# EAGLE board Eagle (EAGLE 5.11)
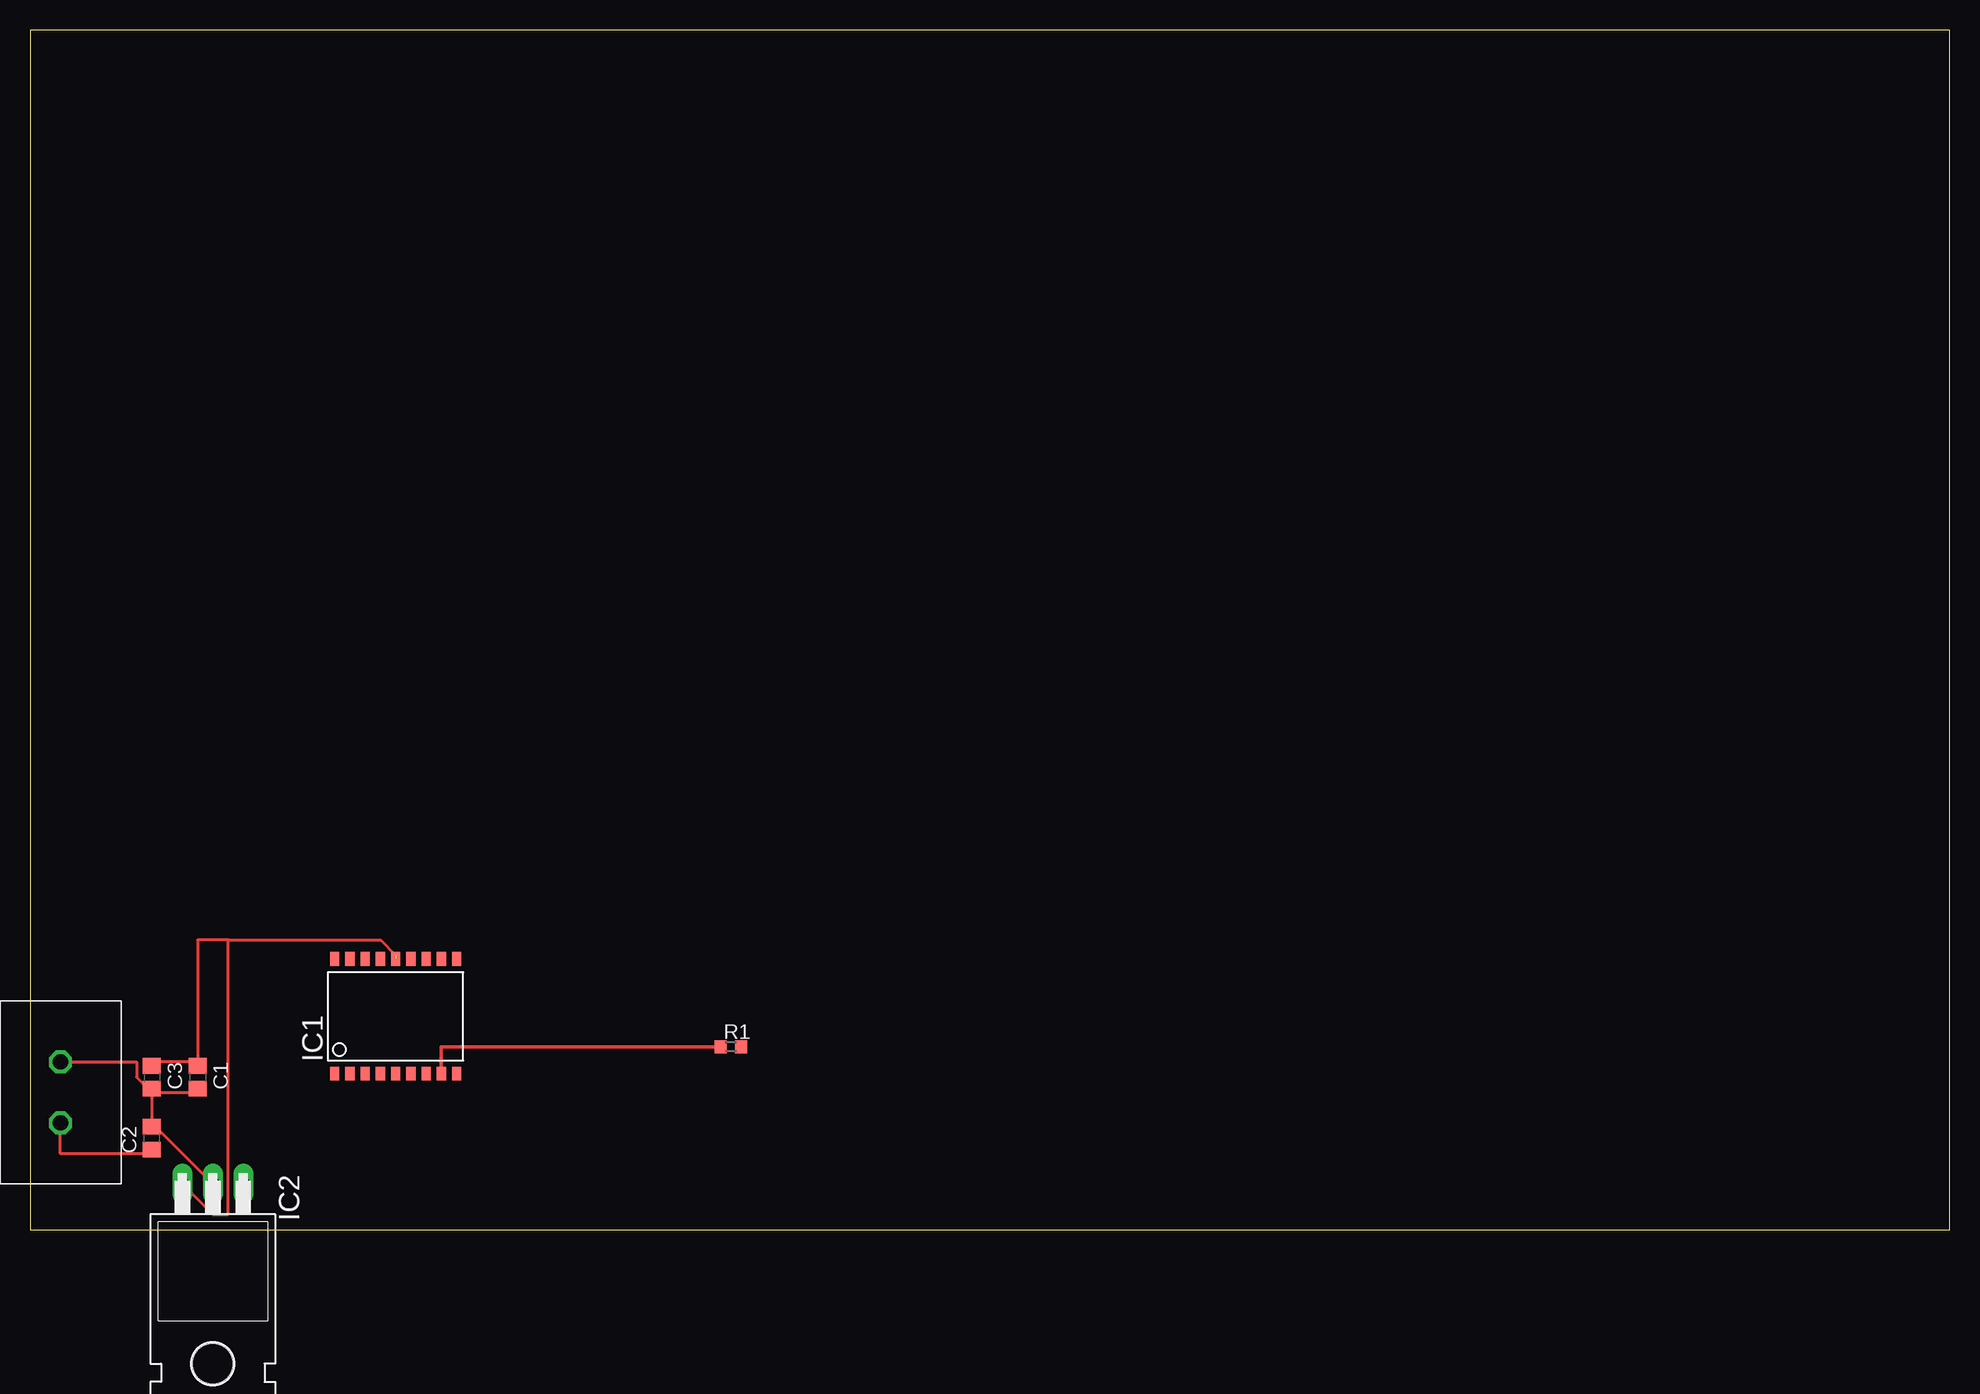
[diagram p0: board, top side]
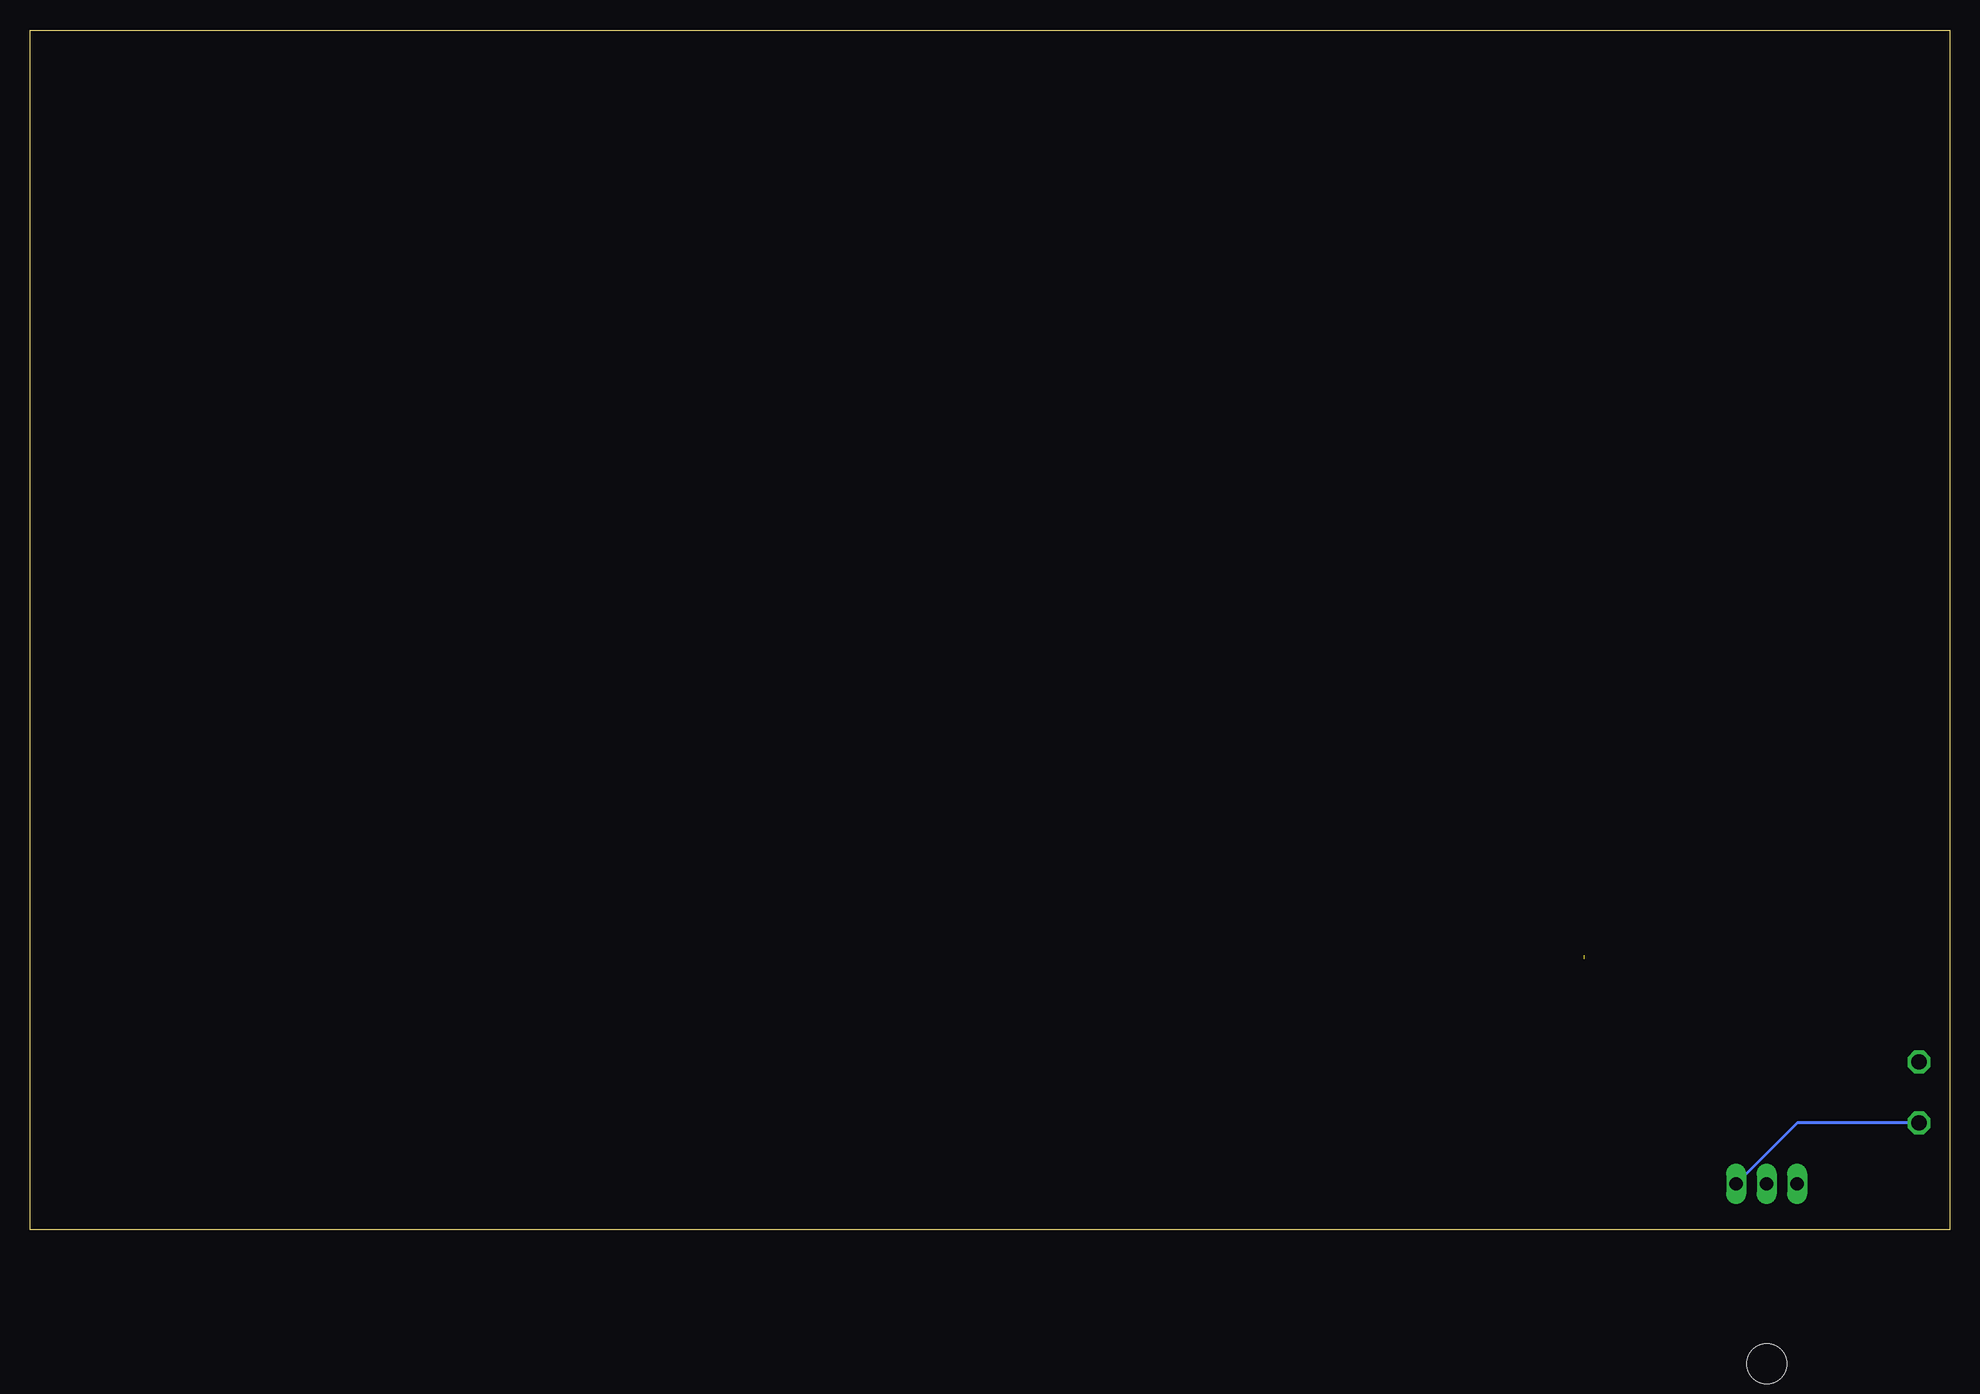
[diagram p1: board, bottom side, seen from below]

Size 160 x 100 mm. Coordinates in mm from the lower left corner, seen from the top.
Outline: 0,0 160,0 160,100 0,100 0,0
Copper layers (1*16): Top 0.035mm / dielectric 1.5mm / Bottom 0.035mm
Design rules "default": minimum track width 10mil, minimum drill 24mil, track to track 8mil, track to pad 8mil, pad to pad 8mil, via to via 8mil, smd to smd 8mil, copper to edge 40mil, drill to drill 8mil, minimum pad ring 10mil, minimum via ring 8mil, stop-mask expansion 4mil, vias tented up to drill 0mil, thermal gap 10mil
Net classes: 1 riko: width 0.305 mm, drill 0.635 mm, clearance 0.305 mm

## Footprints (pad centres in the part's own frame; a part is rotated, then mirrored left to right if it is on the bottom)
C0805 = smd 1.3 x 1.5: 1 -0.95,0; 2 0.95,0
SO-18W = smd 0.762 x 1.143: 1 -5.08,-4.788; 2 -3.81,-4.788; 3 -2.54,-4.788; 4 -1.27,-4.788; 5 0,-4.788; 6 1.27,-4.788; 7 2.54,-4.788; 8 3.81,-4.788; 9 5.08,-4.788; 10 5.08,4.788; 11 3.81,4.788; 12 2.54,4.788; 13 1.27,4.788; 14 0,4.788; 15 -1.27,4.788; 16 -2.54,4.788; 17 -3.81,4.788; 18 -5.08,4.788
TO220H = drill 1.118 long: 1 -2.54,-10.16; 2 0,-10.16; 3 2.54,-10.16 | hole 3.302: 0,4.826
5MM_RASTER = drill 1.27 octagon: P$1 2.54,5.08; P$2 2.54,0
R0603 = smd 1 x 1.1: 1 -0.85,0; 2 0.85,0

## Placement (x,y rotation side)
C1  [C0805]  13.97,12.7 270 top
C2  [C0805]  10.16,7.62 90 top
C3  [C0805]  10.16,12.7 270 top
IC1  PIC16F628SO  [SO-18W]  30.48,17.78 0 top
IC2  7805T  [TO220H]  15.24,-6.35 180 top
POWER  TS502_02  [5MM_RASTER]  0,8.89 0 top
R1  [R0603]  58.42,15.24 0 top

## Library data of the parts
C1-C3 R1 = rcl
IC1 = microchip; MF: MICROCHIP; MPN: PIC16F628-20I/SO; OC_FARNELL: 9760415; OC_NEWARK: 23C4986
IC2 = linear
POWER = Riko_conector_2_5mm

## Nets
GND: C1.2 C2.2 C3.2 IC2.2 POWER.P$1
N$1: C2.1 IC2.1 POWER.P$2
R1 [riko]: IC1.8 R1.1
VDD: C1.1 C3.1 IC1.14 IC2.3
VSS: IC1.5

## Tracks (layer width: path | path; a pad name or v marks a point on that pad's centre or on a via)
GND
  Top 0.254: 10.16,11.43 10.16,8.89 | 10.16,11.43 13.97,11.43 C1.2 | 10.16,8.89 IC2.2 | 10.16,8.89 C2.2 | POWER.P$1 8.89,13.97 8.89,12.7 10.16,11.43 | 10.16,11.43 C3.2
N$1
  Top 0.254: POWER.P$2 2.54,6.35 10.16,6.35 C2.1
  Bottom 0.254: IC2.1 12.7,8.89 POWER.P$2
R1
  Top 0.305: R1.1 34.29,15.24 IC1.8 34.29,12.7
VDD  (1 unrouted)
  Top 0.254: 30.48,22.86 29.21,24.13 16.51,24.13 | 16.51,24.13 13.97,24.13 13.97,13.97 | 13.97,13.97 10.16,13.97 C3.1 | 13.97,13.97 C1.1 | IC2.3 15.24,1.27 16.51,1.27 16.51,24.13